# EAGLE board LED Cube (EAGLE 9.7.0)

Size 121.14 x 184.13 mm. Coordinates in mm from the lower left corner, seen from the top.
Outline: 0,0 121.14,0 121.14,184.13 0,184.13 0,0
Copper layers (1*16): Top 0.035mm / dielectric 1.5mm / Bottom 0.035mm
Design rules "default": minimum track width 6mil, minimum drill 0.35mm, track to track 6mil, track to pad 6mil, pad to pad 6mil, via to via 6mil, smd to smd 6mil, copper to edge 40mil, drill to drill 6mil, minimum pad ring 10mil, minimum via ring 8mil, stop-mask expansion 4mil, vias tented up to drill 0mil, thermal gap 10mil

## Footprints (pad centres in the part's own frame; a part is rotated, then mirrored left to right if it is on the bottom)
LEDRD254W60D565H860B_B = drill 0.981 pad 1.581: 1 -1.27,0; 2 1.27,0
RESAD1016W63L850D250B = drill 0.83 pad 1.43: 1 -5.08,0; 2 5.08,0
TO92 = drill 0.813 octagon: 1 -1.27,0; 2 0,1.905; 3 1.27,0
ARDUINO-UNO-R3-SHIELD = drill 1.016 pad 1.88: 3.3V 24.13,-2.54; 5V 24.13,0; A0 24.13,12.7; A1 24.13,15.24; A2 24.13,17.78; A3 24.13,20.32; A4 24.13,22.86; A5 24.13,25.4; AREF -24.13,-13.97; D2 -24.13,20.32; D3 -24.13,17.78; D4 -24.13,15.24; D5 -24.13,12.7; D6 -24.13,10.16; D7 -24.13,7.62; D8 -24.13,3.81; D9 -24.13,1.27; D10 -24.13,-1.27; D11 -24.13,-3.81; D12 -24.13,-6.35; D13 -24.13,-8.89; GND@0 24.13,2.54; GND@1 24.13,5.08; GND@2 -24.13,-11.43; IOREF 24.13,-7.62; NC 24.13,-10.16; RES 24.13,-5.08; RX -24.13,25.4; SCL -24.13,-19.05; SDA -24.13,-16.51; TX -24.13,22.86; VIN 24.13,7.62

## Placement (x,y rotation side)
D1  BLUE  [LEDRD254W60D565H860B_B]  50.54,168.71 0 top
D2  BLUE  [LEDRD254W60D565H860B_B]  76.13,168.87 0 top
D3  BLUE  [LEDRD254W60D565H860B_B]  63.19,168.78 0 top
D4  BLUE  [LEDRD254W60D565H860B_B]  44.12,161.1 0 top
D5  BLUE  [LEDRD254W60D565H860B_B]  69.7,161.26 0 top
D6  BLUE  [LEDRD254W60D565H860B_B]  56.76,161.17 0 top
D7  BLUE  [LEDRD254W60D565H860B_B]  57.05,175.93 0 top
D8  BLUE  [LEDRD254W60D565H860B_B]  69.69,176 0 top
D9  BLUE  [LEDRD254W60D565H860B_B]  82.63,176.08 0 top
D10  BLUE  [LEDRD254W60D565H860B_B]  56.97,151.2 0 top
D11  BLUE  [LEDRD254W60D565H860B_B]  82.56,151.35 0 top
D12  BLUE  [LEDRD254W60D565H860B_B]  69.62,151.27 0 top
D13  BLUE  [LEDRD254W60D565H860B_B]  50.47,143.98 0 top
D14  BLUE  [LEDRD254W60D565H860B_B]  76.06,144.14 0 top
D15  BLUE  [LEDRD254W60D565H860B_B]  63.12,144.05 0 top
D16  BLUE  [LEDRD254W60D565H860B_B]  44.04,136.37 0 top
D17  BLUE  [LEDRD254W60D565H860B_B]  69.63,136.52 0 top
D18  BLUE  [LEDRD254W60D565H860B_B]  56.69,136.44 0 top
D19  BLUE  [LEDRD254W60D565H860B_B]  57.13,125.69 0 top
D20  BLUE  [LEDRD254W60D565H860B_B]  82.72,125.85 0 top
D21  BLUE  [LEDRD254W60D565H860B_B]  69.78,125.76 0 top
D22  BLUE  [LEDRD254W60D565H860B_B]  50.63,118.48 0 top
D23  BLUE  [LEDRD254W60D565H860B_B]  76.22,118.63 0 top
D24  BLUE  [LEDRD254W60D565H860B_B]  63.28,118.55 0 top
D25  BLUE  [LEDRD254W60D565H860B_B]  44.2,110.86 0 top
D26  BLUE  [LEDRD254W60D565H860B_B]  69.79,111.02 0 top
D27  BLUE  [LEDRD254W60D565H860B_B]  56.85,110.93 0 top
R1  220  [RESAD1016W63L850D250B]  68.21,96.89 90 top
R2  220  [RESAD1016W63L850D250B]  81.48,97.34 90 top
R3  220  [RESAD1016W63L850D250B]  55.25,96.86 90 top
R4  220  [RESAD1016W63L850D250B]  74.69,90.35 90 top
R5  220  [RESAD1016W63L850D250B]  61.43,89.89 90 top
R6  220  [RESAD1016W63L850D250B]  48.47,89.86 90 top
R7  220  [RESAD1016W63L850D250B]  68.3,80.6 90 top
R8  220  [RESAD1016W63L850D250B]  55.04,80.15 90 top
R9  220  [RESAD1016W63L850D250B]  42.23,80.27 90 top
R10  1k  [RESAD1016W63L850D250B]  114.81,171.23 90 top
R11  1k  [RESAD1016W63L850D250B]  102.99,146.21 90 top
R12  1k  [RESAD1016W63L850D250B]  94.85,120.8 90 top
T1  PNP  [TO92]  94.85,125.88 180 top
T2  PNP  [TO92]  102.99,151.29 180 top
T3  PNP  [TO92]  114.81,176.31 180 top
U1  ARDUINO-UNO-R3-SHIELD  [ARDUINO-UNO-R3-SHIELD]  47.88,29.84 270 top

## Library data of the parts
D1-D27 = Tinkercad; CATEGORY: Opto-Electronic; SUB-CATEGORY: LED; VALUE: LED_BLUE
R1-R12 U1 = Tinkercad
T1-T3 = Tinkercad; CATEGORY: Transistor; SUB-CATEGORY: BJT; TYPE: PNP

## Nets
D1_A: D1.1 D13.1 D22.1 R6.2
D2_A: D2.1 D14.1 D23.1 R4.2
D3_A: D3.1 D15.1 D24.1 R5.2
D4_A: D4.1 D16.1 D25.1 R9.2
D5_A: D5.1 D17.1 D26.1 R7.2
D6_A: D6.1 D18.1 D27.1 R8.2
D7_A: D7.1 D10.1 D19.1 R3.2
D8_A: D8.1 D12.1 D21.1 R1.2
D8_C: D1.2 D2.2 D3.2 D4.2 D5.2 D6.2 D7.2 D8.2 D9.2 T3.3
D9_A: D9.1 D11.1 D20.1 R2.2
D12_C: D10.2 D11.2 D12.2 D13.2 D14.2 D15.2 D16.2 D17.2 D18.2 T2.3
D21_C: D19.2 D20.2 D21.2 D22.2 D23.2 D24.2 D25.2 D26.2 D27.2 T1.3
T1_B: R12.2 T1.2
T2_B: R11.2 T2.2
T3_B: R10.2 T3.2
U1_D2: R7.1 U1.D2
U1_D3: R8.1 U1.D3
U1_D4: R9.1 U1.D4
U1_D5: R4.1 U1.D5
U1_D6: R5.1 U1.D6
U1_D7: R6.1 U1.D7
U1_D8: R2.1 U1.D8
U1_D9: R1.1 U1.D9
U1_D10: R3.1 U1.D10
U1_D11: R12.1 U1.D11
U1_D12: R11.1 U1.D12
U1_D13: R10.1 U1.D13
U1_GND: T1.1 T2.1 T3.1 U1.GND@0 U1.GND@1 U1.GND@2

## Tracks (layer width: path | path; a pad name or v marks a point on that pad's centre or on a via)
D1_A  (3 unrouted)
D2_A  (3 unrouted)
D3_A  (3 unrouted)
D4_A  (3 unrouted)
D5_A  (3 unrouted)
D6_A  (3 unrouted)
D7_A  (3 unrouted)
D8_A  (3 unrouted)
D8_C  (9 unrouted)
D9_A  (3 unrouted)
D12_C  (9 unrouted)
D21_C  (9 unrouted)
T1_B  (1 unrouted)
T2_B  (1 unrouted)
T3_B  (1 unrouted)
U1_D2  (1 unrouted)
U1_D3  (1 unrouted)
U1_D4  (1 unrouted)
U1_D5  (1 unrouted)
U1_D6  (1 unrouted)
U1_D7  (1 unrouted)
U1_D8  (1 unrouted)
U1_D9  (1 unrouted)
U1_D10  (1 unrouted)
U1_D11  (1 unrouted)
U1_D12  (1 unrouted)
U1_D13  (1 unrouted)
U1_GND  (5 unrouted)